# Altium PCB CATPIR.PcbDoc
Units mm, origin at the board's own origin, x right, y up, seen from the top; angles counter-clockwise.
Board outline 50 x 19 mm, 2 copper layers (Top Layer, Bottom Layer), stack 1.621 mm thick; 13 components, 9 nets, 34 pads, 10 vias.
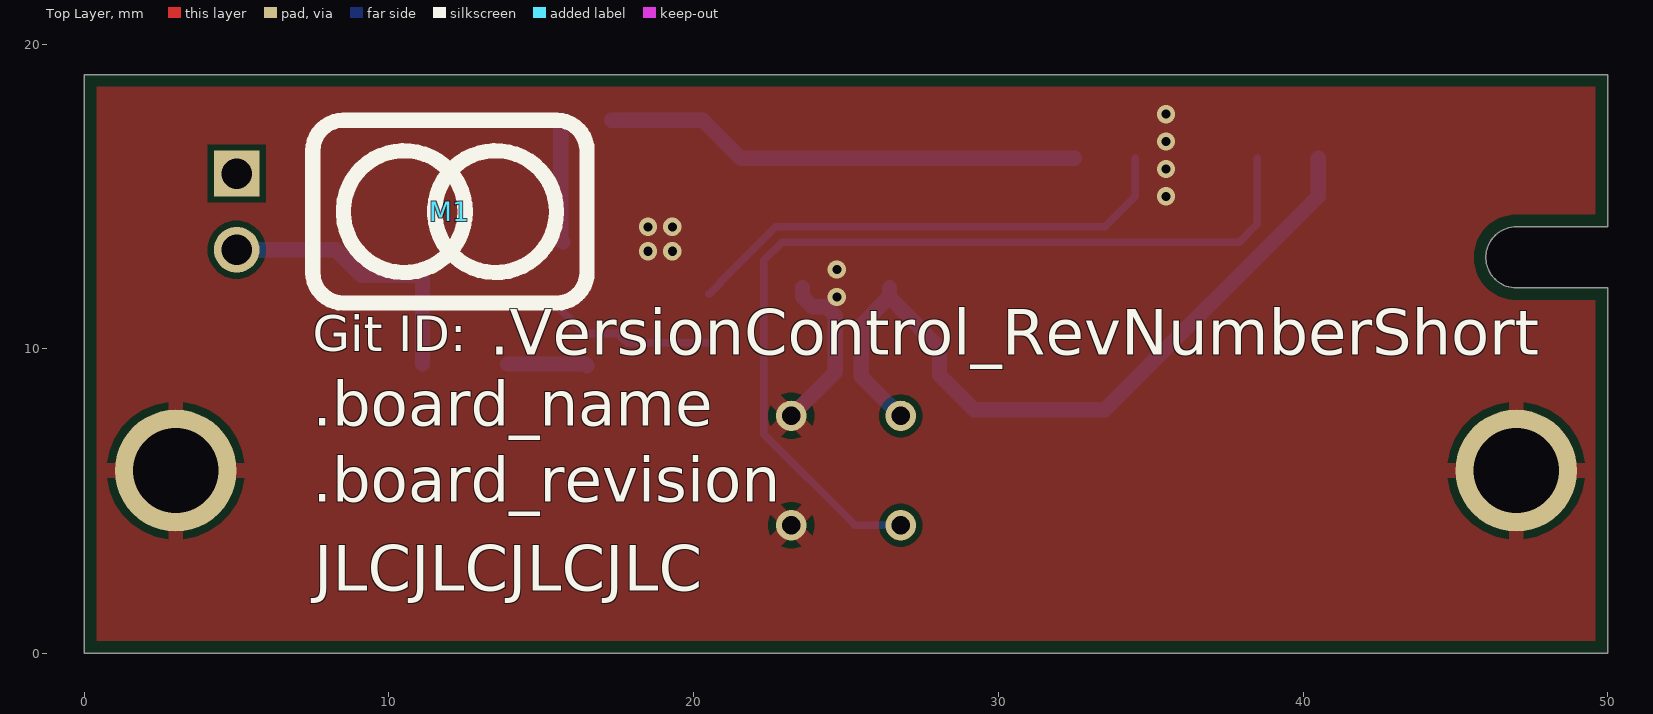
[diagram p0: Top Layer view]
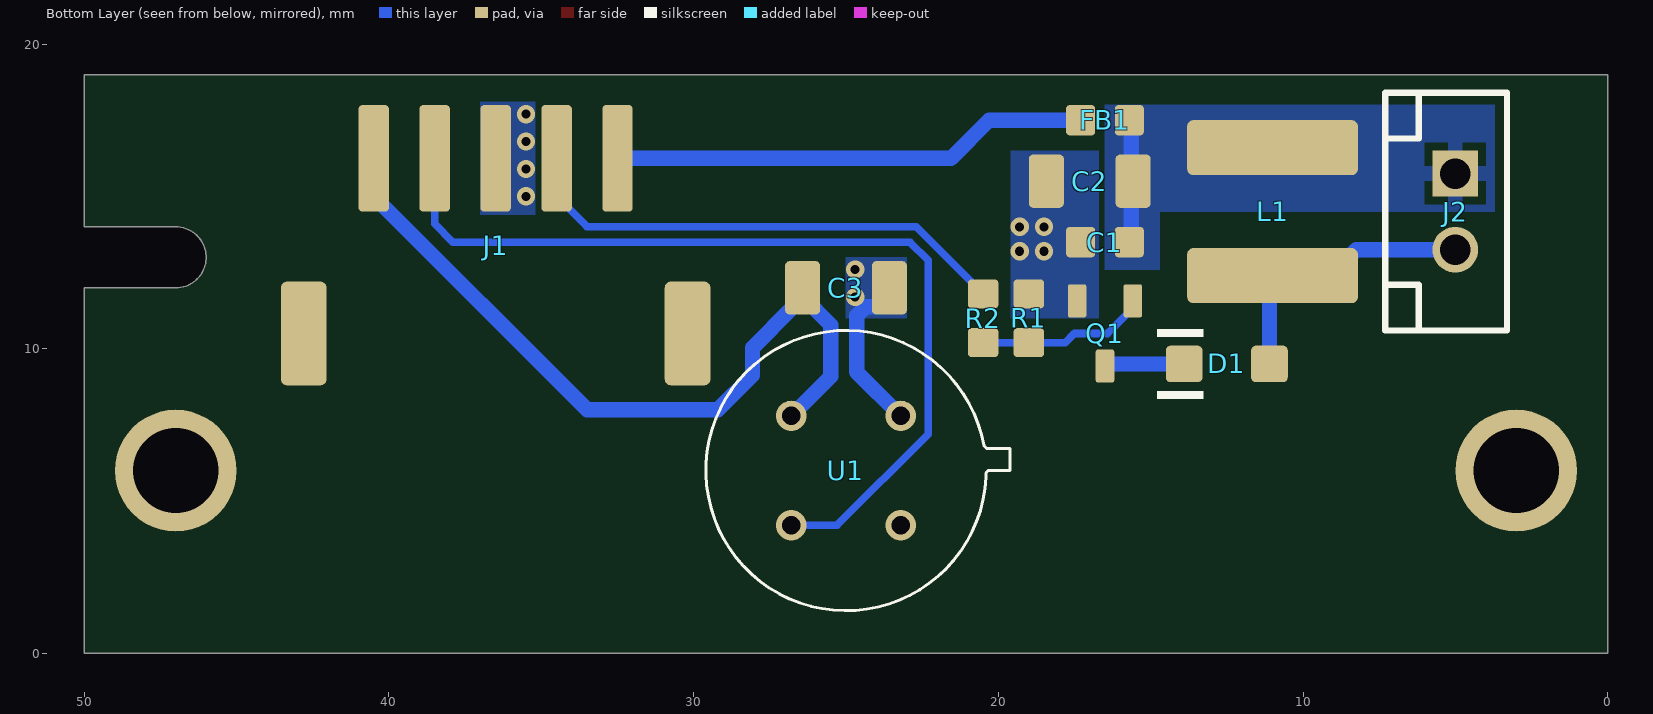
[diagram p1: Bottom Layer view, seen from below]
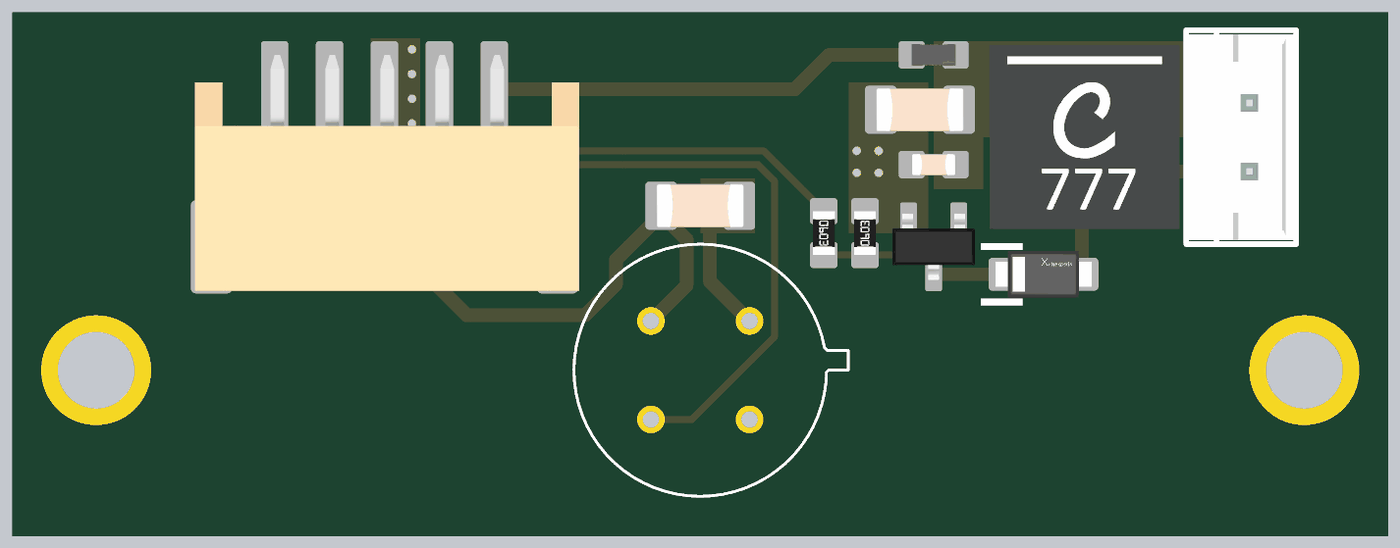
[diagram p2: 3D render of the assembled board from below, using the file's embedded part models]

## Layer stack, top to bottom
Top Solder: solder mask 0.0102, Solder Resist, Dk 3.5
Top Layer: signal copper 0.0356
Dielectric 1: dielectric 1.55, FR-4, Dk 4.8
Bottom Layer: signal copper 0.0356
Bottom Solder: solder mask 0.0102, Solder Resist, Dk 3.5

## Board outline
0,0 0,19 50,19 50,14 47,14 ccw(c47,13) 47,12 50,12 50,0

## Design rules (kind name [scope] priority, off if disabled: settings)
BoardOutlineClearance [IsElectrical or IsPoly] p1: gap=0.4 ignorepadtopadclearanceinfootprint=FALSE
Clearance Clearance_NTPH_to_Track [IsTrack vs IsPad and IsThruPin and not PadIsPlated] p1: gap=0.254 ignorepadtopadclearanceinfootprint=TRUE
Clearance Clearance_TH_Pad_to_TH_Pad [IsPad and IsThruPin vs IsPad and IsThruPin] p2: gap=0.5 ignorepadtopadclearanceinfootprint=TRUE
Clearance Clearance_SMT_Pad_to_SMT_Pad [IsPad and IsSMTPin vs IsPad and IsSMTPin] p3: gap=0.127 ignorepadtopadclearanceinfootprint=TRUE
Clearance [All] p4: gap=0.2 ignorepadtopadclearanceinfootprint=FALSE except(0.127: SMDPad-SMDPad)
DiffPairsRouting HDMI [InDifferentialPairClass('HDMI')] p1: maxlimit=0.2 minlimit=0.2 mostfreqgap=0.2 toplayer_minwidth=0.207 toplayer_maxwidth=0.207 toplayer_prefwidth=0.207 bottomlayer_minwidth=0.207 bottomlayer_maxwidth=0.207 bottomlayer_prefwidth=0.207 impedanceprofiledriven=TRUE impedanceprofileid={C10371E8-B84A-4044-89B9-1F0E894B0926} maxuncoupledlength=12.7
DiffPairsRouting ETH [InDifferentialPairClass('ETH')] p2: maxlimit=0.2 minlimit=0.2 mostfreqgap=0.2 toplayer_minwidth=0.207 toplayer_maxwidth=0.207 toplayer_prefwidth=0.207 bottomlayer_minwidth=0.207 bottomlayer_maxwidth=0.207 bottomlayer_prefwidth=0.207 impedanceprofiledriven=TRUE impedanceprofileid={C10371E8-B84A-4044-89B9-1F0E894B0926} maxuncoupledlength=12.7
DiffPairsRouting USB [InDifferentialPairClass('USB')] p3: maxlimit=0.2 minlimit=0.2 mostfreqgap=0.2 toplayer_minwidth=0.272 toplayer_maxwidth=0.272 toplayer_prefwidth=0.272 bottomlayer_minwidth=0.272 bottomlayer_maxwidth=0.272 bottomlayer_prefwidth=0.272 impedanceprofiledriven=TRUE impedanceprofileid={14A1D308-0AEB-453A-BA91-52939657512A} maxuncoupledlength=12.7
HoleSize NPTH_HoleSize [IsPad And not PadIsPlated] p1: absolutevalues=TRUE maxlimit=3.7 minlimit=0.2 maxpercent=80.000 minpercent=20.000
HoleSize Pad_HoleSize [IsPad] p2: absolutevalues=TRUE maxlimit=2.8 minlimit=0.5 maxpercent=80.000 minpercent=20.000
HoleSize Via_HoleSize [IsVia] p3: absolutevalues=TRUE maxlimit=6.3 minlimit=0.2 maxpercent=80.000 minpercent=20.000
HoleToHoleClearance [All] p1: gap=0.254 allowstackedmicrovias=FALSE
MatchedLengths InterPair_skew_HDMI [InDifferentialPairClass('HDMI')] p1: tolerance=1 checknetsindiffpair=FALSE checkdiffpairvsdiffpair=TRUE checkxsignals=TRUE checkothers=TRUE
MatchedLengths IntraPair_skew_all_DiffPairs [InDifferentialPairClass('All Differential Pairs')] p2: tolerance=0.15 checknetsindiffpair=TRUE checkdiffpairvsdiffpair=FALSE checkxsignals=FALSE checkothers=FALSE
MinimumAnnularRing [All] p1: minimumring=0.13
MinimumSolderMaskSliver [All] p1: minsoldermaskwidth=0.2
PolygonConnect [All] p1: thpad.connectstyle=Relief thpad.reliefconductorwidth=0.5 thpad.reliefentries=4 thpad.polygonreliefangle="90 Angle" thpad.airgapwidth=0.254 smdpad.connectstyle=Direct smdpad.reliefconductorwidth=0.5 smdpad.reliefentries=4 smdpad.polygonreliefangle="90 Angle" smdpad.airgapwidth=0.254 via.connectstyle=Direct via.reliefconductorwidth=0.5 via.reliefentries=4 via.polygonreliefangle="90 Angle" via.airgapwidth=0.254
RoutingVias [All] p1: holewidth=0.3 width=0.6 viastyle="Through Hole" minholewidth=0.2 minwidth=0.4 maxholewidth=0.711 maxwidth=1.27
SilkToSolderMaskClearance [IsPad] p1: minsilkscreentomaskgap=0.2 clearancetoexposedcopper=TRUE
SolderMaskExpansion SolderMaskExpansion_Via [IsVia] p1: expansion=0.102 istentingtop=TRUE
SolderMaskExpansion SolderMaskExpansion_notVia [not IsVia] p2: expansion=0.05 istentingtop=FALSE
SupplyNets "Schematic Supply Nets_2" [InNet('GND')] p1: voltage=0.000
SupplyNets "Schematic Supply Nets_1" [InNet('3V0')] p2: voltage=0.000
SupplyNets "Schematic Supply Nets" [InNet('VBAT')] p3: voltage=0.000
Width [All] p1: maxlimit=2.5 minlimit=0.2 preferedwidth=0.33
25 further rules are at their usual default settings.

## Components (designator, comment, footprint, x,y, rotation, side; value= is the part's Value field where it differs from the comment)
C1 "Capacitor 100nF +/-10% 25V X7R 0603" 0603-C-N 16.5,13.5 r0 bottom value=100nF
C2 "Capacitor 10µF +/-10% 10V X7R 1206" 1206-C-N 17,15.5 r180 bottom value=10µF
C3 "Capacitor 10µF +/-10% 10V X7R 1206" 1206-C-N 25,12 r180 bottom value=10µF
D1 "PMEG10020ELRX" FP-SOD123W-MFG 12.5,9.5 r180 bottom
FB1 "742792625" 0603-L-N 16.5,17.5 r180 bottom
J1 "620105131822" 620105131822 36.5,14.5 r180 bottom locked
J2 "68800211622" 68800211622 5,14.5 r270 bottom
L1 "74404064121" CL_STD6060 11,14.5 r90 bottom
M1 "Logo" LOGO_9x6mm 12,14.5 r180 top
Q1 "AO3400A" SOT-23-3-N 16.5,10.5 r270 bottom
R1 "Resistor 10k +/-1% 50V 0603" 0603-R-N 19,11 r90 bottom value=10k
R2 "Resistor 100R +/-1% 50V 0603" 0603-R-N 20.5,11 r270 bottom value=100
U1 "BS412" BS412-Footprint-1 25,6 r0 bottom locked

## Footprints (in the part's own frame and the unit in brackets; to place one, negate y for a bottom-side part, rotate by r counter-clockwise, add the part's x,y. Pads: shape width x height; smd on the part's side, far side on the other; paste and mask are expansions set on the pad)
0603-C-N [mm]
  rrect25% 0.95x1 smd: 1(-0.8,0) 2(0.8,0)
  body extent -0.8,-0.4 0.8,0.4, height 0.81
0603-L-N [mm]
  rrect25% 0.95x1 smd: 1(-0.8,0) 2(0.8,0)
  body extent -0.8,-0.4 0.8,0.4, height 0.95
0603-R-N [mm]
  rrect25% 0.95x1 smd: 1(-0.8,0) 2(0.8,0)
  body extent -0.8,-0.4 0.8,0.4, height 0.47
1206-C-N [mm] "Chip Capacitor, 2-Leads, 1206, IPC Medium Density"
  rrect25% 1.15x1.75 smd: 1(-1.425,0) 2(1.425,0)
  body extent -1.6,-0.8 1.6,0.8, height 1.16
68800211622 [mm] "2.50mm ¡°J¡± Type Vertical Male Shrouded Header, 2p"
  rect 1.5x1.5 hole 1: 1(-1.25,0)
  round 1.5 hole 1: 2(1.25,0)
  silkscreen extent -3.9,-2.3 3.9,1.7, body extent -3.75,-2.2 3.75,1.6, height 6.03
620105131822 [mm] "2.00mm SMT Male Horizontal Shrouded Header, 5p"
  rrect25% 1x3.5 smd: 1(-4,1.75) 2(-2,1.75) 3(0,1.75) 4(2,1.75) 5(4,1.75)
  rrect25% 1.5x3.4 smd: MP1(-6.3,-4) MP2(6.3,-4)
  body extent -6.9,-5.6 7.1,3, height 5.57
BS412-Footprint-1 [mm]
  round 1 hole 0.6: 1(-1.796,1.796) 2(-1.796,-1.796) 3(1.796,-1.796) 4(1.796,1.796)
  silkscreen extent -5.39,-4.6 4.6,4.6, body extent -5.39,-4.6 4.61,4.6, height 4.3
CL_STD6060 [mm]
  rrect20% 1.8x5.6 smd: 1(-2.1,0) 2(2.1,0)
  body extent -3.35,-3.45 3.36,3.46, height 6
FP-SOD123W-MFG [mm]
  rrect25% 1.2x1.2 smd: 1(-1.4,0) 2(1.4,0)
  silkscreen extent -2.29,-1.14 -0.76,1.14, body extent -1.75,-0.85 1.75,0.85, height 1.1
LOGO_9x6mm [mm]
  silkscreen extent -4.5,-3 4.5,3
SOT-23-3-N [mm] "SOT-23, 3-Leads, Body 3x1.4mm, Pitch 0.95mm, IPC Medium Density"
  rrect25% 1.09x0.61 smd: 1(-1.07,0.915) 2(-1.07,-0.915) 3(1.07,0)
  body extent -1.22,-1.5 1.22,1.5, height 1

## Part data
C1: library part CMP-072-000592-14, "WCAP-CSGP Multilayer Ceramic Chip Capacitor, General Purpose, size 0603, X7R, 100nF, 25VDC", Capacitor Type=MLCC, Case/Package=0603, Dielectric=X7R, Insulation Resistance=5GO, JLCPCB Part #=C14663, Max Operating Temperature=125°C, Min Operating Temperature=-55°C, Tolerance=10%, Voltage Rating=25V, ComponentLink1Description="Website Link", ComponentLink1URL=https://www.we-online.com/redexpert/article/885012206071?ad, ComponentLink2Description="Datasheet Link", ComponentLink2URL=https://www.we-online.com/redexpert/spec/885012206071?ad, Design Item ID=885012206071, Dissipation Factor=3.5%, FLIR Part #=YCAM100N-5, Height=0.8mm, Length=1.6mm, Match Code=WCAP-CSGP, Mounting Technology=SMT, Packaging="Tape and Reel", Pins=2, Source=WCAP-CSGP.SchLib, Technical Reference=X7R0603104K025DFCT10000, Usage="General Purpose", Width=0.8mm
C2 C3: library part CMP-072-000777-16, "WCAP-CSGP Multilayer Ceramic Chip Capacitor, General Purpose, size 1206, X7R, 10µF, 10VDC", Capacitor Type=MLCC, Case/Package=1206, Dielectric=X7R, Insulation Resistance=0.01GO, JLCPCB Part #=C70462, Max Operating Temperature=125°C, Min Operating Temperature=-55°C, Tolerance=10%, Voltage Rating=10V, ComponentLink1Description="Website Link", ComponentLink1URL=https://www.we-online.com/redexpert/article/885012208018?ad, ComponentLink2Description="Datasheet Link", ComponentLink2URL=https://www.we-online.com/redexpert/spec/885012208018?ad, Design Item ID=885012208018, Dissipation Factor=10%, FLIR Part #=YCAM10U-9, Height=1.6mm, Length=3.2mm, Match Code=WCAP-CSGP, Mounting Technology=SMT, Packaging="Tape and Reel", Pins=2, Source=WCAP-CSGP.SchLib, Technical Reference=X7R1206106K010DFCT10000, Usage="General Purpose", Width=1.6mm
D1: library part CMP-004-00046-6, "Diode Schottky 100V 2A 2-Pin SOD-123F T/R", Average Rectified Current=2A, Case/Package=SOD-123F, Forward Voltage="830 mV @ 2 A", JLCPCB Part #=C456130, Max Reverse Voltage (DC)=100V, Forward Current=2A, Mounting Technology="Surface Mount", Packaging="Tape and Reel", RoHS Compliant=Yes, Series=-
FB1: library part CMP-066-000112-5, "WE-CBF SMT EMI Suppression Ferrite Bead, size 0603, 120O, 2A", Case/Size Code=0603, DC Resistance Max=0.05O, JLCPCB Part #=C114770, Manufacturer="Wurth Elektronik", Operating Temperature Max=125°C, Operating Temperature Min=-55°C, Rated Current=2A, Category="Ferrites for PCB Assembly", Component Type=Standard, ComponentLink1Description="Website Link", ComponentLink1URL=https://www.we-online.com/redexpert/article/742792625?ad, ComponentLink2Description="Datasheet Link", ComponentLink2URL=https://www.we-online.com/redexpert/spec/742792625?ad, Design Item ID=742792625, FLIR Part #=YCOLFB100E-1, Height=0.8mm, Impedance @100MHz=120O, Impedance Max=180O, Impedance Max Test Condition=400MHz, Length=1.6mm, Manufacturer Part Number=742792625, Match Code=WE-CBF, Mount="Surface Mount", Packaging="Tape and Reel", Pin Count=2, Source=WE-CBF.SchLib, Type="High Current", Width=0.8mm
J1: library part CMP-047-000043-4, "WR-WTB SMT Male Horizontal Shrouded Header, pitch 2mm, 5p", Contact Resistance=20mOhm, Operating Temperature="-25 to +85degC", Rated Current=2A, Withstanding Voltage=800VAC, Working Voltage=100VAC, Component Type=Standard, ComponentLink1Description=Manufacturer, ComponentLink1URL=http://www.we-online.de, ComponentLink2Description=Datasheet, ComponentLink2URL=https://www.we-online.com/catalog/datasheet/620105131822.pdf, Design Item ID=620105131822, Gender=Male, Mounting Technology=SMT, Packaging="Tape and Reel", Part Number=620105131822, Pin Count=5, Pin Number=5, Pitch=2mm, Published Date="January 2020", Publisher="Wurth Elektronik", Source=WR-WTB_2.00mm.SchLib, Type=Horizontal
J2: library part CMP-047-000210-4, "WR-WTB “J” Type THT Vertical Male Shrouded Header, pitch 2.5mm, 2p", Contact Resistance=20mOhm, JLCPCB Part #=C160262, Operating Temperature="-25 to +85degC", Rated Current=3A, Withstanding Voltage=800VAC, Working Voltage=250VAC, Component Type=Standard, ComponentLink1Description=Manufacturer, ComponentLink1URL=http://www.we-online.de, ComponentLink2Description=Datasheet, ComponentLink2URL=https://www.we-online.com/catalog/datasheet/68800211622.pdf, Design Item ID=68800211622, Gender=Male, Mounting Technology=THT, Packaging=Bag, Part Number=68800211622, Pin Count=2, Pin Number=2, Pitch=2.5mm, Published Date="January 2020", Publisher="Wurth Elektronik", Source=WR-WTB_2.50mm.SchLib, Type=Vertical
L1: library part CMP-002-001279-2, "WE-LQS SMT Power Inductor, size 6045, 120µH, 0.85A, 0.52O", Case/Size Code=6045, DC Resistance=0.52O, Inductance=120µH, Manufacturer="Wurth Elektronik", Operating Temperature Max=125°C, Operating Temperature Min=-40°C, Rated Current=0.85A, Saturation Current=1A, Self Resonant Frequency=5.78MHz, Category="Shielded Power Inductors", Component Type=Standard, ComponentLink1Description="Website Link", ComponentLink1URL=https://www.we-online.com/redexpert/article/74404064121?ad, ComponentLink2Description="Datasheet Link", ComponentLink2URL=https://www.we-online.com/redexpert/spec/74404064121?ad, Design Item ID=74404064121, Height=4.5mm, Length=6mm, Manufacturer Part Number=74404064121, Match Code=WE-LQS, Mount="Surface Mount", Packaging="Tape and Reel", Pin Count=2, Source=WE-LQS.SchLib, Width=6mm
Q1: library part CMP-013-00063-4, "Trans MOSFET N-CH 30V 5.7A 3-Pin SOT-23", Case/Package=TO-236-3, Continuous Drain Current (ID)=5.7A, Drain to Source Resistance=25mR, Drain to Source Voltage (Vdss)=30V, Gate to Source Voltage (Vgs)=8V, Id - Continuous Drain Current=4.2A, Input Capacitance=630pF, JLCPCB Part #=C20917, Max Operating Temperature=150°C, Max Power Dissipation=1.4W, Min Operating Temperature=-55°C, Package Quantity=3000, Power Dissipation=780mW, Drain-source On Resistance-Max=25mR, Element Configuration=Single, Fall Time=9.6ns, Height=1.1mm, Lead Free="Lead Free", Length=3mm, Mounting Technology="Surface Mount", Number of Channels=1, Number of Elements=1, On-State Resistance=25mR, Packaging="Cut Tape", Pins=3, Polarity=N-CHANNEL, Rds On Max=26.5mR, Reach SVHC Compliant=Yes, Rise Time=8.3ns, RoHS Compliant=Yes, Series=-, Transistor Type=NMOS, Turn-Off Delay Time=40.1ns, Turn-On Delay Time=8.1ns, Vgs(th) (Max) @ Id="900mV @ 250µA", Weight=0.000282oz, Width=1.4mm
R1: library part CMP-009-00017-25, "Chip Resistor, Thick Film, General Purpose, 0603, 100mW, 50V, 10 kOhm, +/-1%", Case/Package=0603, JLCPCB Part #=C25804, Max Operating Temperature=155°C, Min Operating Temperature=-55°C, Power Rating=100mW, Resistor Type="Thick Film", Tolerance=1%, Voltage Rating=50V, Elements=1, FLIR Part #=YRES10K-1, Mounting Technology=SMT, Pins=2, RoHS Compliant=Yes, Usage="General Purpose"
R2: library part CMP-009-00232-15, "Chip Resistor, Thick Film, General Purpose, 0603, 63mW, 50V, 100 Ohm, +/-1%", Case/Package=0603, JLCPCB Part #=C22775, Max Operating Temperature=155°C, Min Operating Temperature=-55°C, Power Rating=100mW, Resistor Type="Thick Film", Temperature Coefficient=100ppm/°C, Tolerance=1%, Voltage Rating=50V, Elements=1, Mounting Technology=SMT, Pins=2, RoHS Compliant=Yes, Usage="General Purpose"
U1: library part CMP-001-0045-5, "Mini Basic PIR Sensor - BS412", JLCPCB Part #=C410378

## Free pads (board coordinates)
  round 4 hole 2.8: MH1(3,6) MH2(47,6)

## Via types
v1: diameter 0.6, hole 0.3, Top Layer to Bottom Layer, tented both sides, 10 vias

## Nets (pads, with @x,y where several pads share a name; then routed paths per layer and width w, separated by ;. In a path a pad name is that pad's centre, name@x,y a point inside that pad or via, vN(x,y) a via of type N, cw(c..) or ccw(c..) an arc to the next point about the centre after c; other vN are vias at no path point)
3V0: C3.1 J1.1 U1.3 | length 25.4
  Bottom Layer w0.5: C3.1 26.425,11.675 26.4,11.675 25.5,10.775 25.5,9.092 U1.3 ; C3.1@26.45,11.675 26.75,11.375 26.75,11.35 28.072,10.028 28.072,9.128 29.2,8 33.5,8 40.5,15 J1.1
GND: C1.2 C2.1 C3.2 J1.3 pad.MH1 pad.MH2 Q1.2 R1.2 U1.1 U1.2 | length 5.5
  Bottom Layer w0.5: U1.2 24.65,9.242 24.65,11.082 24.357,11.375 23.9,11.375 23.575,11.7 C3.2
  other v1: 24.7,11.7 24.7,12.6 18.5,13.2 19.3,13.2 18.5,14 19.3,14 35.5,15 35.5,15.9 35.5,16.8 35.5,17.7
NetD1_1: D1.1 Q1.3 | length 2.6
  Bottom Layer w0.5: D1.1 16.445,9.5 16.5,9.445 Q1.3
NetD1_2: D1.2 J2.2 L1.1 | length 9.3
  Bottom Layer w0.5: J2.2 8.25,13.25 9.1,12.4 L1.1 11.1,12.3 D1.2
NetFB1_1: FB1.1 J1.5 | length 15.7
  Bottom Layer w0.5: FB1.1 20.3,17.5 21.55,16.25 J1.5
NetJ1_4: J1.4 R2.1 | length 16.6
  Bottom Layer w0.25: R2.1 20.525,11.8 20.875,12.15 20.875,12.175 22.7,14 33.5,14 34.5,15 J1.4
NetQ1_1: Q1.1 R1.1 R2.2 | length 5.6
  Bottom Layer w0.25: Q1.1 15.585,11.33 15.765,11.15 16.415,10.5 17.5,10.5 17.8,10.2 R1.1 R2.2
PIR_DETECT: J1.2 U1.4 | length 30.3
  Bottom Layer w0.25: U1.4 25.296,4.204 22.3,7.2 22.3,12.9 22.9,13.5 37.9,13.5 38.5,14.1 J1.2
VBAT: C1.1 C2.2 FB1.2 J2.1 L1.2 | length 4.1
  Bottom Layer w0.5: C1.1 15.637,13.563 15.637,15.438 C2.2 15.637,15.562 15.637,17.437 FB1.2
pads on no net: J1.MP1 J1.MP2

## Polygon pours and split planes (outlines as drawn)
GND on Bottom Layer "GND_L02_P003" (solid, remove dead copper, pour order 3): 23,11 25,11 25,13 23,13
GND on Bottom Layer "NONET_L-01_P-001" (solid, remove dead copper, pour order 2): 35.2,14.4 37,14.4 37,18.1 35.2,18.1
GND on Bottom Layer "NONET_L-01_P-001" (solid, remove dead copper, pour order 1): 16.7,16.5 16.7,11 19.6,11 19.6,16.5
VBAT on Bottom Layer "NONET_L-01_P-001" (solid, remove dead copper, pour order 0): 3.7,18 3.7,14.5 14.7,14.5 14.7,12.6 16.5,12.6 16.5,18
GND on Top Layer "GND_L01_P004" (solid, remove dead copper, pour order 4): 0,0 0,19 50,19 50,0

## Silkscreen, mask and mechanical layers (free items; w line width, h text height)
Top Overlay:
  text ".VersionControl_RevNumberShort" at 13.3,9.8 h1.5
  text "Git ID:" at 7.5,9.53 h2
  text ".board_name" at 7.5,7 h2.5
  text ".board_revision" at 7.5,4.5 h2.5
  text "JLCJLCJLCJLC" at 7.55,2.05 h1.5
Board outline:
  the board outline again, w0.1
Bottom 3D Body:
  circle w0.1: c3,6 r4
  circle w0.1: c47,6 r4
Fab Notes:
  drawing of 191 lines, arcs and shapes, not listed
  text "Layer" at 56.968,54.789 h1.52
  text "Name" at 67.38,54.789 h1.52
  text "Material" at 90.996,54.789 h1.52
  text "Thickness" at 112.834,54.789 h1.52
  text "Constant" at 129.34,54.789 h1.52
  text "Board Layer Stack" at 143.814,54.789 h1.52
  text "Top Overlay" at 67.38,51.741 h1.52
  text "Top Solder" at 67.38,48.693 h1.52
  text "Solder Resist" at 90.996,48.693 h1.52
  text "0.010mm" at 112.834,48.693 h1.52
  text "3.5" at 129.34,48.693 h1.52
  text "1" at 56.968,45.645 h1.52
  text "Top Layer" at 67.38,45.645 h1.52
  text "0.036mm" at 112.834,45.645 h1.52
  text "Dielectric 1" at 67.38,42.597 h1.52
  text "FR-4" at 90.996,42.597 h1.52
  text "1.550mm" at 112.834,42.597 h1.52
  text "4.8" at 129.34,42.597 h1.52
  text "2" at 56.968,39.549 h1.52
  text "Bottom Layer" at 67.38,39.549 h1.52
  text "0.036mm" at 112.834,39.549 h1.52
  text "Bottom Solder" at 67.38,36.501 h1.52
  text "Solder Resist" at 90.996,36.501 h1.52
  text "0.010mm" at 112.834,36.501 h1.52
  text "3.5" at 129.34,36.501 h1.52
  text "Bottom Overlay" at 67.38,33.453 h1.52
  text "Soldermask color : green / Silkscreen color : white / Surface finish : Pb-free HASL / Via covering : tented / Board outline clearance : +/- 0.2mm / PCB Order Nr : replace JLCJLCJLCJLC by correct order nr." at 53.6,0 h6